# EAGLE board ProcessorTestBoardV1_0 (EAGLE 7.3.0)
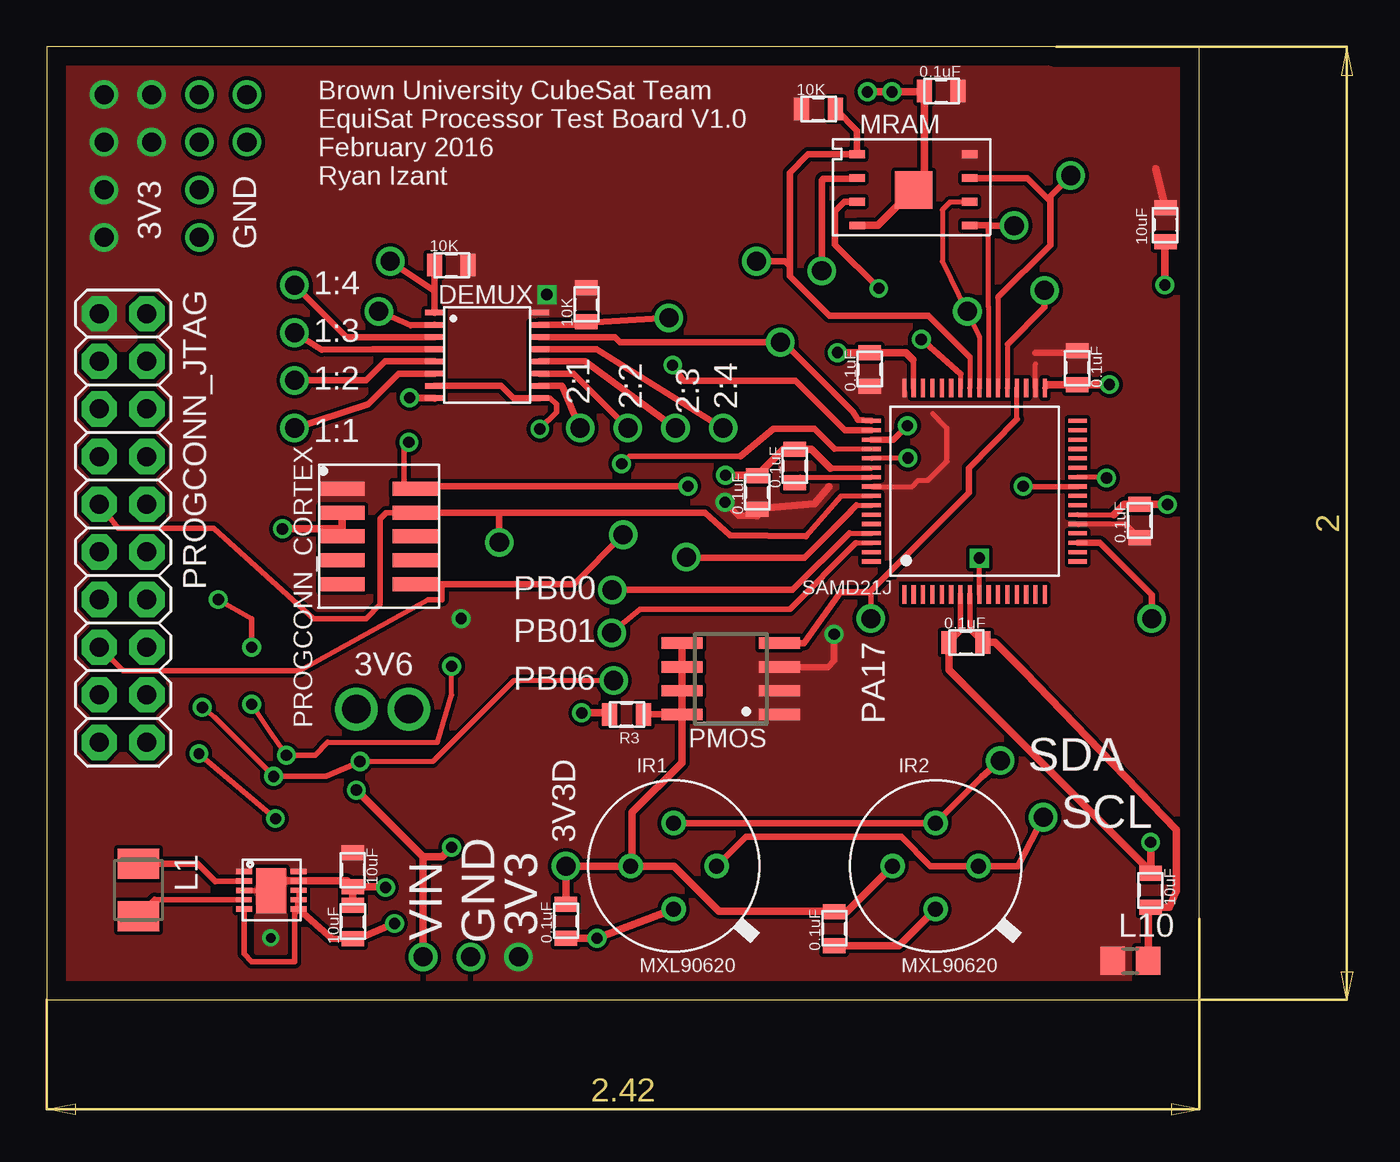
[diagram p0: board, top side]
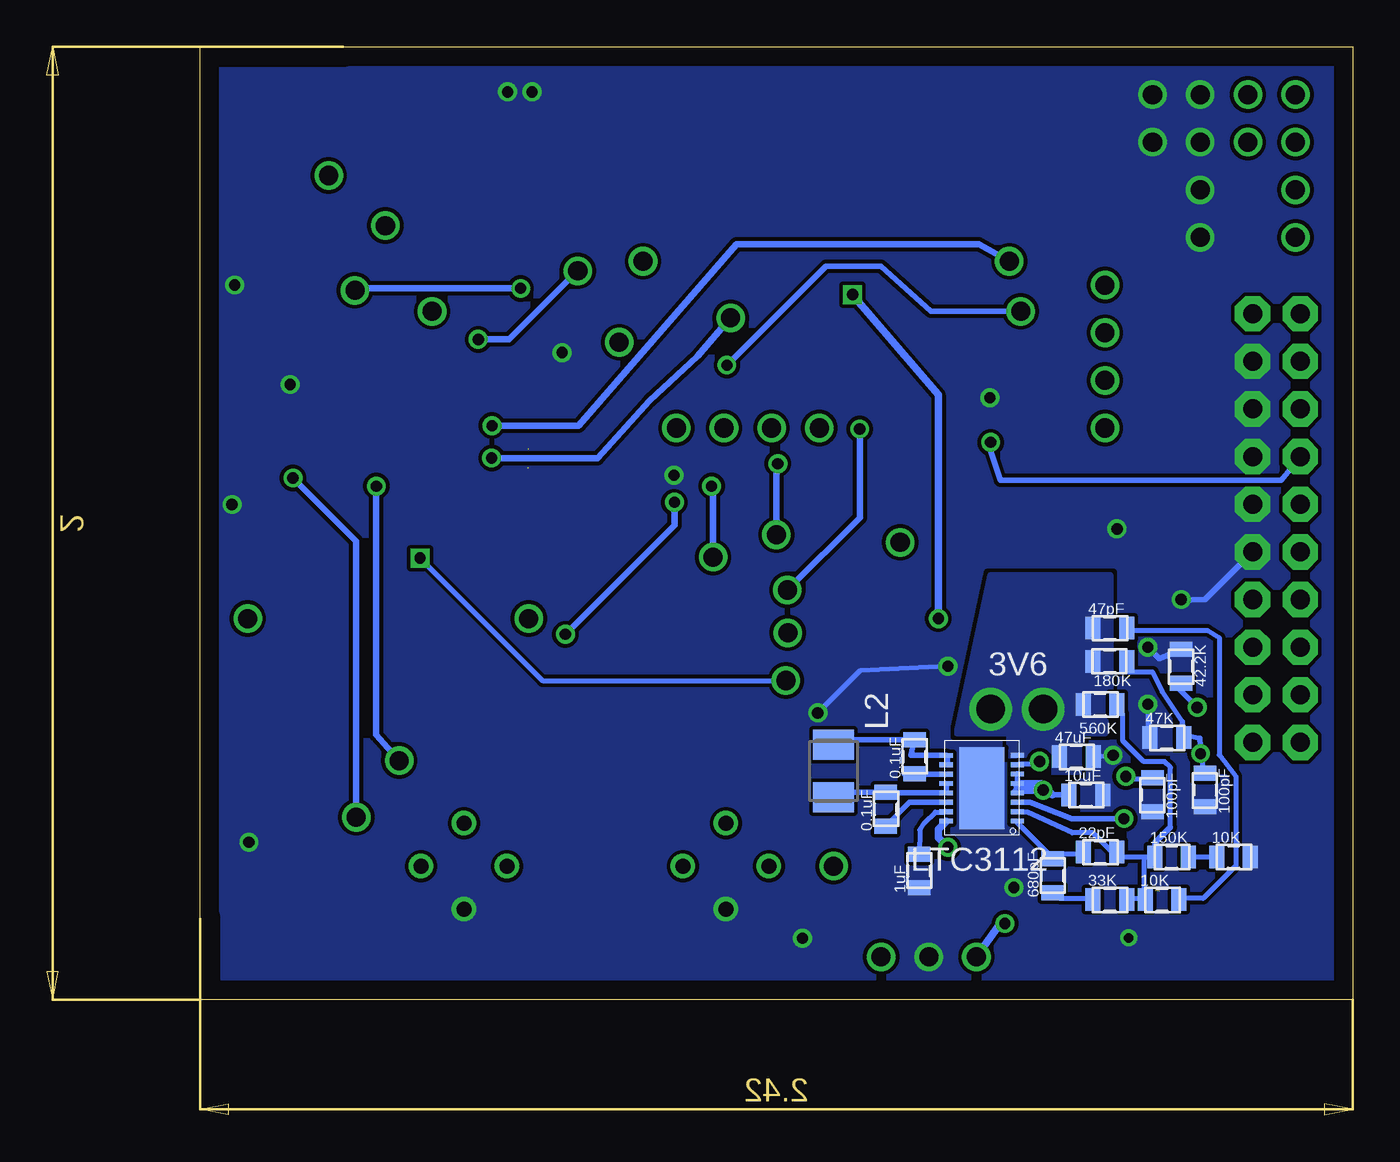
[diagram p1: board, bottom side, seen from below]

Size 61.47 x 50.8 mm. Coordinates in mm from the lower left corner, seen from the top.
Outline: 0,0 61.47,0 61.47,50.8 0,50.8 0,0
Copper layers (1*16): Top 0.035mm / dielectric 1.5mm / Bottom 0.035mm
Design rules "default": minimum track width 10mil, minimum drill 24mil, track to track 8mil, track to pad 8mil, pad to pad 8mil, via to via 8mil, smd to smd 8mil, copper to edge 40mil, drill to drill 8mil, minimum pad ring 10mil, minimum via ring 8mil, stop-mask expansion 4mil, vias tented up to drill 0mil, thermal gap 10mil

## Footprints (pad centres in the part's own frame; a part is rotated, then mirrored left to right if it is on the bottom)
0805 = smd 0.8 x 1.2: 1 -0.9,0; 2 0.9,0
SOIC16R = smd 0.3 x 1: P$1 0,0; P$2 0.65,0; P$3 1.3,0; P$4 1.95,0; P$5 2.6,0; P$6 3.25,0; P$7 3.9,0; P$8 4.55,0; P$9 4.55,5.6; P$10 3.9,5.6; P$11 3.25,5.6; P$12 2.6,5.6; P$13 1.95,5.6; P$14 1.3,5.6; P$15 0.65,5.6; P$16 0,5.6
MXL90620 = drill 0.8: SCL 2.293,0; VDD -2.293,0; VSS 0,-2.294 | drill 0.8 pad 1.2: SDA 0,2.294
L3225M = smd 1.6 x 2.2: 1 -1.4,0; 2 1.4,0
R0805 = smd 1.3 x 1.5: 1 -0.95,0; 2 0.95,0
DHD16 = smd 0.25 x 0.7: 1 0.125,0.35; 2 0.625,0.35; 3 1.125,0.35; 4 1.625,0.35; 5 2.125,0.35; 6 2.638,0.35; 7 3.125,0.35; 8 3.638,0.35; 9 3.625,4.15; 10 3.125,4.15; 11 2.625,4.15; 12 2.125,4.15; 13 1.625,4.15; 14 1.125,4.15; 15 0.625,4.15; 16 0.125,4.15 | smd 4.34 x 2.44: 17 1.875,2.25
8PXMO-229 = smd 0.813 x 0.406: P1 -3,1.895; P2 -3,0.635; P3 -3,-0.635; P4 -3,-1.895; P5 3,-1.895; P6 3,-0.635; P7 3,0.635; P8 3,1.895 | smd 2 x 2: P9 0,0
SO08 = smd 0.6 x 2.2: 1 -1.905,-2.6; 2 -0.635,-2.6; 3 0.635,-2.6; 4 1.905,-2.6; 5 1.905,2.6; 6 0.635,2.6; 7 -0.635,2.6; 8 -1.905,2.6
HARWIN_ARCHER_10_SMD = smd 0.74 x 2.4: 1 6.35,0; 2 5.08,0; 3 3.81,0; 4 2.54,0; 5 1.27,0; 6 1.27,-3.89; 7 2.54,-3.89; 8 3.81,-3.89; 9 5.08,-3.89; 10 6.35,-3.89
2X10 = drill 1.016 pad 1.88 octagon: 1 -11.43,-1.27; 2 -11.43,1.27; 3 -8.89,-1.27; 4 -8.89,1.27; 5 -6.35,-1.27; 6 -6.35,1.27; 7 -3.81,-1.27; 8 -3.81,1.27; 9 -1.27,-1.27; 10 -1.27,1.27; 11 1.27,-1.27; 12 1.27,1.27; 13 3.81,-1.27; 14 3.81,1.27; 15 6.35,-1.27; 16 6.35,1.27; 17 8.89,-1.27; 18 8.89,1.27; 19 11.43,-1.27; 20 11.43,1.27
TQFP-64 = smd 1 x 0.22: P$1 -5.5,3.5; P$2 -5.5,3; P$3 -5.5,2.5; P$4 -5.5,2; P$5 -5.5,1.5; P$6 -5.5,1; P$7 -5.5,0.5; P$8 -5.5,0; P$9 -5.5,-0.5; P$10 -5.5,-1; P$11 -5.5,-1.5; P$12 -5.5,-2; P$13 -5.5,-2.5; P$14 -5.5,-3; P$15 -5.5,-3.5; P$16 -5.5,-4; P$33 5.5,-4; P$34 5.5,-3.5; P$35 5.5,-3; P$36 5.5,-2.5; P$37 5.5,-2; P$38 5.5,-1.5; P$39 5.5,-1; P$40 5.5,-0.5; P$41 5.5,0; P$42 5.5,0.5; P$43 5.5,1; P$44 5.5,1.5; P$45 5.5,2; P$46 5.5,2.5; P$47 5.5,3; P$48 5.5,3.5 | smd 0.22 x 1: P$17 -3.75,-5.75; P$18 -3.25,-5.75; P$19 -2.75,-5.75; P$20 -2.25,-5.75; P$21 -1.75,-5.75; P$22 -1.25,-5.75; P$23 -0.75,-5.75; P$24 -0.25,-5.75; P$25 0.25,-5.75; P$26 0.75,-5.75; P$27 1.25,-5.75; P$28 1.75,-5.75; P$29 2.25,-5.75; P$30 2.75,-5.75; P$31 3.25,-5.75; P$32 3.75,-5.75; P$49 3.75,5.25; P$50 3.25,5.25; P$51 2.75,5.25; P$52 2.25,5.25; P$53 1.75,5.25; P$54 1.25,5.25; P$55 0.75,5.25; P$56 0.25,5.25; P$57 -0.25,5.25; P$58 -0.75,5.25; P$59 -1.25,5.25; P$60 -1.75,5.25; P$61 -2.25,5.25; P$62 -2.75,5.25; P$63 -3.25,5.25; P$64 -3.75,5.25
QFN10_POWERPAD = smd 0.28 x 0.85: P$1 0.14,0.441; P$2 0.641,0.441; P$3 1.141,0.442; P$4 1.639,0.439; P$5 2.139,0.442; P$6 2.14,3.359; P$7 1.639,3.359; P$8 1.139,3.355; P$9 0.641,3.355; P$10 0.139,3.358 | smd 2.4 x 1.6: PAD 1.155,1.898

## Placement (x,y rotation side)
C1  10uF  [0805]  16.32,6.93 270 top
C2  10uF  [0805]  16.31,4.14 90 top
C3  0.1uF  [0805]  39.88,28.45 90 top
C4  0.1uF  [0805]  37.88,27.04 90 top
C5  10uF  [0805]  59.65,41.32 270 top
C6  0.1uF  [0805]  58.28,25.52 90 top
C7  0.1uF  [0805]  54.96,33.69 270 top
C8  0.1uF  [0805]  43.88,33.6 90 top
C9  0.1uF  [0805]  49.02,19.05 0 top
C10  10uF  [0805]  58.87,5.84 270 top
C11  0.1uF  [0805]  47.7,48.46 0 top
C12  0.1uF  [0805]  27.68,4.18 90 top
C13  0.1uF  [0805]  41.99,3.78 90 top
C14  680pF  [0805]  16,6.6 90 bottom
C15  22pF  [0805]  13.46,7.87 0 bottom
C16  10uF  [0805]  14.22,10.92 0 bottom
C17  100pF  [0805]  7.87,11.18 270 bottom
C18  100pF  [0805]  10.67,10.92 270 bottom
C19  47uF  [0805]  14.73,12.95 0 bottom
C20  1uF  [0805]  23.11,6.86 90 bottom
C21  0.1uF  [0805]  23.37,12.95 90 bottom
C22  0.1uF  [0805]  24.89,10.16 90 bottom
C23  47pF  [0805]  12.95,19.81 0 bottom
DEMUX  [SOIC16R]  20.68,36.63 270 top
IR1  MXL90620  [MXL90620]  33.43,7.12 0 top
IR2  MXL90620  [MXL90620]  47.4,7.12 0 top
L1  2.2uH  [L3225M]  4.88,5.85 270 top
L2  4.7uH  [L3225M]  27.69,12.19 270 bottom
L10  [R0805]  57.79,2.07 0 top
LTC3112  [DHD16]  17.53,9.4 90 bottom
MRAM  [8PXMO-229]  46.22,43.18 0 top
PMOS  POWERPMOS  [SO08]  36.48,17.11 90 top
PROGCONN_CORTEX  HARWIN_ARCHER_10_SMD  [HARWIN_ARCHER_10_SMD]  15.75,20.89 90 top
PROGCONN_JTAG  [2X10]  4.06,25.15 270 top
R1  10K  [0805]  21.58,39.17 0 top
R2  10K  [0805]  28.77,37.05 90 top
R3  10K  [0805]  30.91,15.21 0 top
R4  10K  [0805]  41.15,47.5 0 top
R5  10K  [0805]  6.35,7.62 0 bottom
R6  150K  [0805]  9.65,7.62 0 bottom
R7  180K  [0805]  12.95,18.03 180 bottom
R8  33K  [0805]  12.95,5.33 0 bottom
R9  560K  [0805]  13.46,15.75 0 bottom
R10  47K  [0805]  9.91,13.97 0 bottom
R11  42.2K  [0805]  9.14,17.78 270 bottom
R12  10K  [0805]  10.16,5.33 0 bottom
SAMD21J  SAMD21JTQFP-64  [TQFP-64]  49.23,27.11 90 top
TPS63001  TPS6300X  [QFN10_POWERPAD]  10.07,6.97 270 top

## Library data of the parts
C1-C23 DEMUX IR1 IR2 LTC3112 PMOS PROGCONN_CORTEX PROGCONN_JTAG R1-R12 TPS63001 = CNTRL_BOARD
L1 L2 = resistor
L10 = rcl
MRAM = mram
SAMD21J = SAMD21J_Easy

## Nets
1B1: DEMUX.P$6
1B2: DEMUX.P$5
1B3: DEMUX.P$4
1B4: DEMUX.P$3
2B1: DEMUX.P$10
2B2: DEMUX.P$11
2B3: DEMUX.P$12
2B4: DEMUX.P$13
3V3: C1.1 C4.1 C5.1 C6.1 C7.1 C8.1 C11.2 DEMUX.P$16 L10.1 MRAM.P8 PMOS.1 PMOS.2 PMOS.3 PROGCONN_CORTEX.1 PROGCONN_JTAG.1 R1.2 R2.2 R4.1 SAMD21J.P$21 SAMD21J.P$34 SAMD21J.P$48 SAMD21J.P$56 TPS63001.P$1 TPS63001.P$10
3V6: C19.1 C23.1 LTC3112.8 R7.2 R9.1
COMP: C14.2 C15.1 LTC3112.1
FB: C15.2 LTC3112.2 R6.1 R8.2 R9.2 R12.1
GND: C1.2 C2.2 C3.2 C4.2 C5.2 C6.2 C7.2 C8.2 C9.1 C10.1 C11.1 C12.1 C13.1 C16.2 C17.2 C18.2 C19.2 C20.1 DEMUX.P$8 IR1.VSS IR2.VSS LTC3112.17 MRAM.P4 MRAM.P9 PROGCONN_CORTEX.2 PROGCONN_CORTEX.3 PROGCONN_JTAG.4 PROGCONN_JTAG.6 PROGCONN_JTAG.8 PROGCONN_JTAG.10 PROGCONN_JTAG.12 R3.1 R5.2 R10.1 R11.1 SAMD21J.P$7 SAMD21J.P$22 SAMD21J.P$33 SAMD21J.P$47 SAMD21J.P$54 TPS63001.P$3 TPS63001.P$9 TPS63001.PAD
N$1: C12.2 C13.2 IR1.VDD IR2.VDD PMOS.5 PMOS.6 PMOS.7 PMOS.8 R3.2
N$2: L1.2 TPS63001.P$4
N$3: L1.1 TPS63001.P$2
N$4: C14.1 R8.1
N$5: C23.2 R12.2
N$6: R5.1 R6.2
N$8: C3.1 SAMD21J.P$55
N$17: C9.2 C10.2 L10.2 SAMD21J.P$8
N$23: C20.2 LTC3112.15
N$25: C22.1 LTC3112.14
N$26: C22.2 L2.2 LTC3112.12 LTC3112.13
N$28: C21.2 L2.1 LTC3112.9 LTC3112.10
N$29: C21.1 LTC3112.11
OVP: C17.1 LTC3112.3 R7.1 R10.2
PA10: SAMD21J.P$19
PA17: PMOS.4 SAMD21J.P$36
PA27: DEMUX.P$1 R1.1 SAMD21J.P$51
PA28: DEMUX.P$15 R2.1 SAMD21J.P$53
PA30: PROGCONN_CORTEX.9 PROGCONN_JTAG.9 SAMD21J.P$57
PA31: PROGCONN_CORTEX.10 PROGCONN_JTAG.7 SAMD21J.P$58
PB00: DEMUX.P$7 DEMUX.P$9 SAMD21J.P$61
PB01: SAMD21J.P$62
PB06: C18.1 LTC3112.7 R11.2 SAMD21J.P$9
PB22: DEMUX.P$14 SAMD21J.P$49
PB23: DEMUX.P$2 SAMD21J.P$50
RESETN: PROGCONN_CORTEX.6 PROGCONN_JTAG.15 SAMD21J.P$52
SCK: MRAM.P6 SAMD21J.P$40
SCL: IR1.SCL IR2.SCL SAMD21J.P$26
SDA: IR1.SDA IR2.SDA SAMD21J.P$25
SI: MRAM.P5 SAMD21J.P$39
SO: MRAM.P2 SAMD21J.P$42
VIN: C2.1 C16.1 LTC3112.4 LTC3112.5 LTC3112.6 LTC3112.16 TPS63001.P$5 TPS63001.P$6 TPS63001.P$7 TPS63001.P$8
~CS: MRAM.P1 R4.2 SAMD21J.P$41
~HOLD: MRAM.P7 SAMD21J.P$38
~WP: MRAM.P3 SAMD21J.P$37

## Tracks (layer width: path | path; a pad name or v marks a point on that pad's centre or on a via)
1B1  (via drill 1.02)
  Top 0.356: v13.21,30.48 17.14,31.75 18.77,33.38 DEMUX.P$6
1B2  (via drill 1.02)
  Top 0.356: DEMUX.P$5 18.03,34.03 17.02,33.02 v13.21,33.02
1B3  (via drill 1.02)
  Top 0.356: DEMUX.P$4 17.41,34.68 14.66,34.65 v13.21,35.56
1B4  (via drill 1.02)
  Top 0.356: DEMUX.P$3 15.98,35.33 v13.21,38.1
2B1  (via drill 1.02)
  Top 0.356: v28.45,30.48 27.47,32.73 DEMUX.P$10
2B2  (via drill 1.02)
  Top 0.356: v30.99,30.48 28.09,33.38 DEMUX.P$11
2B3  (via drill 1.02)
  Top 0.356: v33.53,30.48 28.71,34.03 DEMUX.P$12
2B4  (via drill 1.02)
  Top 0.356: v36.07,30.48 29.33,34.68 DEMUX.P$13
3V3  (via drill 0.6, 1.02)
  Top 0.254: SAMD21J.P$56 46.16,27.36 46.48,27.69 46.99,27.69 48.01,28.7 48.01,30.48 47.24,31.24 | SAMD21J.P$34 52.73,33.88 | SAMD21J.P$21 57.55,25.35 C6.1
  Top 0.356: 37.88,25.81 36.87,25.81 v36.17,26.52 | v41.99,19.48 41.99,18.06 41.66,17.73 39.09,17.73 PMOS.3 | 52.73,34.49 54.86,34.49 C7.1
  Top 0.406: 41.71,27.36 40.95,26.44 37.88,26.19 C4.1 37.88,25.81 | 59.15,44.3 C5.1
  Bottom 0.356: v36.17,26.52 36.17,25.3 v41.99,19.48
  Bottom 0.406: v26.67,37.59 22.1,32.26 v22.1,20.32
  other vias: 25.15,2.29 3.05,48.26 3.05,45.72 3.05,43.18 5.59,48.26 5.59,45.72 3.05,40.64
  pour Top (no thermals): -2.4,53.35 65.87,53.6 65.87,-3.4 -2.5,-3.65
3V6  (via drill 1.52)
  other vias: 19.3,15.49 16.51,15.49
  pour Bottom (no thermals): 18.29,12.95 16,12.95 16,12.19 14.48,12.19 14.48,14.22 13.21,14.22 13.21,16.26 12.95,16.26 12.95,22.61 19.3,22.61 21.08,14.22 18.29,14.22
COMP
  Bottom 0.254: LTC3112.1 17.97,9.53 16.06,7.62 C14.2 16.06,7.78 14.48,7.78 C15.1
FB
  Bottom 0.254: 11.14,5.4 11.94,5.4 R8.2 | LTC3112.2 17.81,10 17.34,10 14.95,8.89 13.84,8.89 12.89,7.94 12.57,7.94 C15.2 12.57,7.78 12.41,7.62 11.14,7.62 | 11.14,7.62 R6.1 | 9.71,9.21 9.71,12.38 10.03,12.7 11.14,12.7 12.25,13.81 12.25,15.24 R9.2 | 11.14,7.62 11.14,5.4 | 11.14,5.4 R12.1
  Bottom 0.305: 9.71,9.21 10.55,8.37 R6.1
GND  (via drill 0.51, 0.6, 1.02)  (2 unrouted)
  Top 0.254: v12.78,13.03 11.94,14.22 v10.92,15.75 | 14.99,13.72 20.83,13.72 21.59,16.26 v21.59,17.78 | 53.41,32.79 SAMD21J.P$33 | SAMD21J.P$22 56.9,25.86
  Top 0.305: 41.78,28.35 43.96,28.35 | v10.92,18.8 10.92,20.32 v9.14,21.34 | SAMD21J.P$7 48.73,19.66 C9.1 | 46.2,34.11 46.23,34.09 SAMD21J.P$47 | 14.99,13.72 14.3,13.03 v12.78,13.03 | 10.31,5.82 TPS63001.PAD
  Top 0.406: v59.63,38.11 59.63,40.1 C5.2 | v12.57,25.1 15.75,25.1 PROGCONN_CORTEX.3 PROGCONN_CORTEX.2 | v19.35,32.09 v19.36,32.09 DEMUX.P$8 | v58.87,8.4 C10.1 58.46,7.25 48.12,17.59 C9.1 | v59.77,26.4 59.77,26.42 C6.2 57.46,26.42 56.9,25.86 | v56.67,32.8 C7.2 53.41,32.79 | v42.17,34.5 C8.2 45.81,34.5 46.2,34.11 | v43.77,48.4 v45.07,48.4 46.74,48.4 C11.1 46.8,43.76 MRAM.P9 44.32,41.28 MRAM.P4 | v18.06,5.98 17.76,6.03 C1.2 | C1.2 16.31,5.51 C2.2 | C1.2 16.02,6.33 TPS63001.P$9 11.97,6.33 TPS63001.PAD | IR2.VSS 45.45,2.88 C13.1 | IR1.VSS v29.34,3.28 C12.1 | R3.1 29.94,15.29 v28.52,15.29 | 41.78,28.35 40.78,29.35 C3.2 39.29,29.35 C4.2 37.85,27.96 v36.2,27.96
  Bottom 0.254: C19.2 v12.78,13.03 | v10.92,15.75 10.92,14.09 R10.1 | v21.59,17.78 26.29,17.53 v28.52,15.29
  Bottom 0.305: R11.1 10.3,18.17 v10.92,18.8 | v9.14,21.34 7.87,21.34 PROGCONN_JTAG.12
  other vias: 22.61,2.29 11.94,3.3 8.13,48.26 8.13,45.72 8.13,43.18 10.67,48.26 10.67,45.72 8.13,40.64
  pour Bottom (rank 2, no thermals): -2.3,52.94 64.67,53.7 64.67,-3.9 -2.3,-4.66
  pour Top (no thermals): 11.18,2.54 11.18,6.86 12.7,6.86 12.7,2.54
N$1  (via drill 1.02)
  Top 0.356: R3.2 PMOS.8
  Top 0.406: PMOS.5 PMOS.6 PMOS.7 PMOS.8 33.88,12.64 31.22,9.98 31.22,7.2 IR1.VDD | IR1.VDD v27.69,7.12 C12.2 | IR1.VDD 33.44,7.12 35.84,4.72 41.94,4.72 C13.2 42.66,4.68 IR2.VDD
N$2
  Top 0.305: TPS63001.P$4 5.76,5.33
  Top 0.356: 5.76,5.33 L1.2
N$3
  Top 0.305: 8.97,6.33 TPS63001.P$2
  Top 0.356: L1.1 8.04,7.25 8.97,6.33
N$4
  Bottom 0.254: R8.1 14,5.4 15.59,5.4 15.91,5.71 C14.1
N$5
  Bottom 0.254: R12.2 9.24,5.4 7.97,5.4 6.22,7.14 6.22,11.91 7.11,13.05 7.11,19.3 7.75,19.68 11.94,19.68 C23.2
N$6
  Bottom 0.254: R6.2 R5.1
N$8
  Top 0.254: C3.1 40.19,27.86 SAMD21J.P$55
N$17
  Top 0.305: 49.87,19 C9.2 49.23,19.74 SAMD21J.P$8
  Top 0.406: L10.2 58.74,4.81 C10.2 59.85,4.94 60.25,5.79 60.25,9.07 52.15,17.48 50.57,19.05 C9.2
N$23
  Bottom 0.254: LTC3112.15 21.78,10 22.26,10 22.83,9.43 23.08,9.05 C20.2
N$25
  Bottom 0.305: LTC3112.14 23.63,10.52 C22.1
N$26
  Bottom 0.305: LTC3112.12 LTC3112.13 24.85,11.02 C22.2 28.43,11.06 L2.2
N$28
  Bottom 0.254: LTC3112.10 21.62,12.54 21.62,13.02 LTC3112.9
  Bottom 0.305: LTC3112.9 23.55,13.02 C21.2 28.44,13.85 L2.1
N$29
  Bottom 0.305: LTC3112.11 23.91,12.02 C21.1
OVP  (via drill 0.58)
  Top 0.305: v12.19,9.65 v8.11,13.12
  Bottom 0.254: 8.16,13.94 8.83,14.1 9.08,13.97 | v8.11,13.12 7.97,12.22 C17.1 | 9.08,13.97 9.08,14.83 | 9.08,13.97 R10.2 9.08,14.83 | 9.08,14.83 10.16,16.41 10.67,17.46 11.94,17.46 R7.1
  Bottom 0.305: LTC3112.3 17.22,10.52 14.99,9.65 v12.19,9.65 | v8.11,13.12 8.16,13.94
PA10  (via drill 1.02)
  Top 0.356: SAMD21J.P$19 56.16,24.36 58.93,21.59 v58.93,20.32
PA17  (via drill 1.02)
  Top 0.254: 51.74,30.94 51.73,30.95 SAMD21J.P$36
  Top 0.305: 43.87,21.72 43.94,21.64 v43.94,20.32
  Top 0.356: PMOS.4 40.38,19.02 42.32,21.72 43.87,21.72 49.17,27.03 49.17,28.35 51.74,30.94
PA27  (via drill 0.6, 1.02)
  Top 0.356: DEMUX.P$1 20.68,37.74 | 20.68,37.74 R1.1 | SAMD21J.P$51 45.15,29.86 v45.9,30.61 | v18.31,39.37 20.58,37.85 20.68,37.74
  Bottom 0.356: v45.9,30.61 41.27,30.61 32.87,40.28 19.94,40.28 v18.31,39.37
PA28  (via drill 0.6, 1.02)
  Top 0.254: 45.9,28.86 SAMD21J.P$53
  Top 0.356: DEMUX.P$15 28.68,35.98 R2.1 28.8,36.09 v33.17,36.35 | 45.9,28.86 v45.92,28.88
  Bottom 0.356: v45.92,28.88 40.28,28.88 37.49,31.93 34.95,34.31 v33.17,36.35
PA30  (via drill 1.02)
  Top 0.254: 42.34,26.85 42.35,26.86 SAMD21J.P$57
  Top 0.305: PROGCONN_JTAG.9 3.81,25.15 8.89,25.15 14.22,20.32 17.02,20.32 17.78,21.08 17.78,25.65 18.1,25.97 PROGCONN_CORTEX.9 | 42.34,26.85 40.49,24.71
  Top 0.356: PROGCONN_CORTEX.9 24.13,25.97 | 24.13,25.97 35.09,25.97 36.42,24.77 40.49,24.71 | v24.13,24.38 24.13,25.97
PA31  (via drill 0.6, 1.02)
  Top 0.254: 43.17,26.36 SAMD21J.P$58
  Top 0.305: PROGCONN_CORTEX.10 19.05,27.24 | 19.05,27.24 18.99,27.24 | v19.3,29.72 19.05,29.46 19.05,27.24
  Top 0.356: 43.17,26.36 42.85,26.04 42.85,26.01 40.41,23.57 34.14,23.57 v34.11,23.6 | v34.19,27.38 19.78,27.38 PROGCONN_CORTEX.10
  Bottom 0.305: PROGCONN_JTAG.7 3.81,27.69 18.8,27.69 19.3,29.21 v19.3,29.72
  Bottom 0.356: v34.11,23.6 34.11,27.3 v34.19,27.38
PB00  (via drill 0.6, 1.02)
  Top 0.254: 42.8,24.87 42.81,24.86 SAMD21J.P$61
  Top 0.305: DEMUX.P$9 26.85,32.08 27.18,31.75 27.18,31.32 v26.29,30.43
  Top 0.356: DEMUX.P$7 24.22,32.73 24.89,32.05 26.25,32.05 DEMUX.P$9 | v30.15,21.84 39.78,21.84 42.8,24.87
  Bottom 0.356: v26.29,30.43 26.29,25.7 v30.15,21.84
PB01  (via drill 1.02)
  Top 0.254: 43.16,24.36 SAMD21J.P$62
  Top 0.305: 43.16,24.36 39.62,20.83 31.65,20.83 v30.12,19.56
PB06  (via drill 0.6, 0.61, 1.02)
  Top 0.254: SAMD21J.P$9 v49.73,23.55 | v30.23,17.02 24.89,17.02 20.57,12.7 v16.7,12.7 | v8.29,15.59 8.92,15.08 v12.1,11.91
  Top 0.305: v16.7,12.7 14.89,11.91 v12.1,11.91
  Bottom 0.254: v16.7,12.7 16.86,12.54 17.81,12.54 LTC3112.7 | v12.1,11.91 11.94,11.75 10.67,11.75 C18.1 | v8.29,15.59 9.56,16.86 R11.2 | v49.73,23.55 43.2,17.02 v30.23,17.02
PB22  (via drill 1.02)
  Top 0.356: DEMUX.P$14 30.3,35.33 30.58,35.05 v39.12,35.05 39.29,35.05 43,31.34 43.27,30.91 SAMD21J.P$49
PB23  (via drill 0.58, 1.02)
  Top 0.356: SAMD21J.P$50 42.56,30.36 39.93,32.99 33.96,32.99 v33.38,33.83 | v17.7,36.7 19.39,35.97 DEMUX.P$2
  Bottom 0.305: v17.7,36.7 22.48,36.7 25.15,39.12 28.09,39.12 v33.38,33.83
RESETN  (via drill 0.6, 1.02)  (1 unrouted)
  Top 0.254: 42.01,29.36 SAMD21J.P$52
  Top 0.305: PROGCONN_JTAG.15 4.06,17.53 13.48,17.53 20.34,21.34 21.08,21.34 21.08,22.16 | 36.98,28.98 31.06,28.98 v30.66,28.57
  Top 0.356: PROGCONN_CORTEX.6 21.08,22.16 28.1,22.16 v30.73,24.79 | 36.98,28.98 38.76,30.43 40.95,30.43 42.01,29.36
  Bottom 0.356: v30.73,24.79 30.73,28.5 v30.66,28.57
SCK  (via drill 1.02)
  Top 0.254: MRAM.P6 49.19,42.52 48.16,42.52 47.75,42.11 47.75,39.37 49.11,36.62 | 49.11,36.62 49.73,35.36 SAMD21J.P$40 | v49.1,36.7 v49.11,36.69 49.11,36.62
SCL  (via drill 0.6, 1.02)
  Top 0.254: v56.52,27.81 56.47,27.86 SAMD21J.P$26
  Top 0.356: IR1.SCL 37.29,8.69 45.57,8.69 47.13,7.12 IR2.SCL 51.8,7.12 v53.14,9.73
  Bottom 0.356: v56.52,27.81 53.14,24.43 v53.14,9.73
SDA  (via drill 0.6, 1.02)
  Top 0.305: 52.09,27.36 SAMD21J.P$25
  Top 0.356: IR1.SDA IR2.SDA 49.84,11.85 v50.85,12.75 | v52.07,27.38 52.09,27.36
  Bottom 0.356: v50.85,12.75 52.07,14.12 v52.07,27.38
SI  (via drill 1.02)
  Top 0.254: SAMD21J.P$39 50.24,32.62 50.24,36.91 50.23,36.92 50.23,41.27
  Top 0.356: MRAM.P5 50.23,41.29 50.23,41.27 v51.59,41.27
SO  (via drill 0.6, 1.02)
  Top 0.254: 48.73,33.37 SAMD21J.P$42
  Top 0.356: 48.73,33.37 v46.63,35.2 | v41.33,38.86 41.33,43.69 41.4,43.76 43.17,43.76 MRAM.P2
  Bottom 0.356: v46.63,35.2 44.98,35.2 v41.33,38.86
VIN  (via drill 0.6, 1.02)
  Top 0.254: TPS63001.P$8 TPS63001.P$7
  Top 0.305: TPS63001.P$5 10.51,2.44 10.92,2.03 13.21,2.03 13.21,4.61 TPS63001.P$6
  Top 0.356: C2.1 15.22,3.24 TPS63001.P$6 TPS63001.P$7 13.38,4.81
  Top 0.406: v18.54,4.06 16.31,3.1 C2.1 | v16.51,11.18 20.07,7.62 | 20.07,7.62 v20.07,2.29 | v21.59,8.13 21.08,7.62 20.07,7.62
  Bottom 0.254: LTC3112.4 17.97,11.11 17.97,11.43 LTC3112.5
  Bottom 0.305: LTC3112.4 17.78,11.43 | C16.1 16,10.92 | LTC3112.5 LTC3112.6
  Bottom 0.406: v20.07,2.29 18.8,4.06 v18.54,4.06 | 16,10.92 16.6,11.52 LTC3112.5 | 17.97,11.11 17.91,11.18 v16.51,11.18 | LTC3112.16 22.1,9.1 22.1,8.64 v21.59,8.13
~CS  (via drill 1.02)
  Top 0.254: 49.2,34.29 49.23,34.26 SAMD21J.P$41
  Top 0.356: 39.62,39.12 39.62,44.09 40.61,45.08 MRAM.P1 43.22,46.33 R4.2 | 39.62,39.12 39.62,38.58 41.73,36.47 47.02,36.47 49.2,34.29 | v37.85,39.37 39.37,39.37 39.62,39.12
~HOLD  (via drill 1.02)
  Top 0.254: 50.73,37.44 SAMD21J.P$38
  Top 0.33: 50.73,37.44 53.52,40.23
  Top 0.356: 53.52,40.23 53.52,42.57 | 53.52,42.57 52.3,43.79 49.24,43.79 MRAM.P7 | v54.61,43.94 53.52,42.85 53.52,42.57
~WP  (via drill 0.58, 1.02)
  Top 0.254: 51.26,34.95 51.23,34.92 SAMD21J.P$37
  Top 0.356: MRAM.P3 42.55,42.55 42.04,42.04 42.04,40.26 v44.37,37.92 | v53.21,37.82 53.21,36.91 51.26,34.95
  Bottom 0.356: v44.37,37.92 53.11,37.92 v53.21,37.82

## Text on the board
tPlace: Brown University CubeSat Team / EquiSat Processor Test Board V1.0 / February 2016 / Ryan Izant
tNames: 3V3 | GND | 1:4 | 1:3 | 1:2 | 2:1 | 2:2 | 2:3 | 2:4 | 1:1 | PB00 | 3V6 | PB01 | PB06 | PA17 | SDA | GND | SCL | 3V3 | 3V3D | VIN
bNames: 3V6
Measures: PA27 | PB23 | RESETN | PA30 | PA31 | PA10
Document: ~HOLD | SI | ~CS | SCK | PA28 | SO | ~WP | PB22